# EAGLE board Circut_board_binary_decimal_converter (EAGLE 9.5.2)
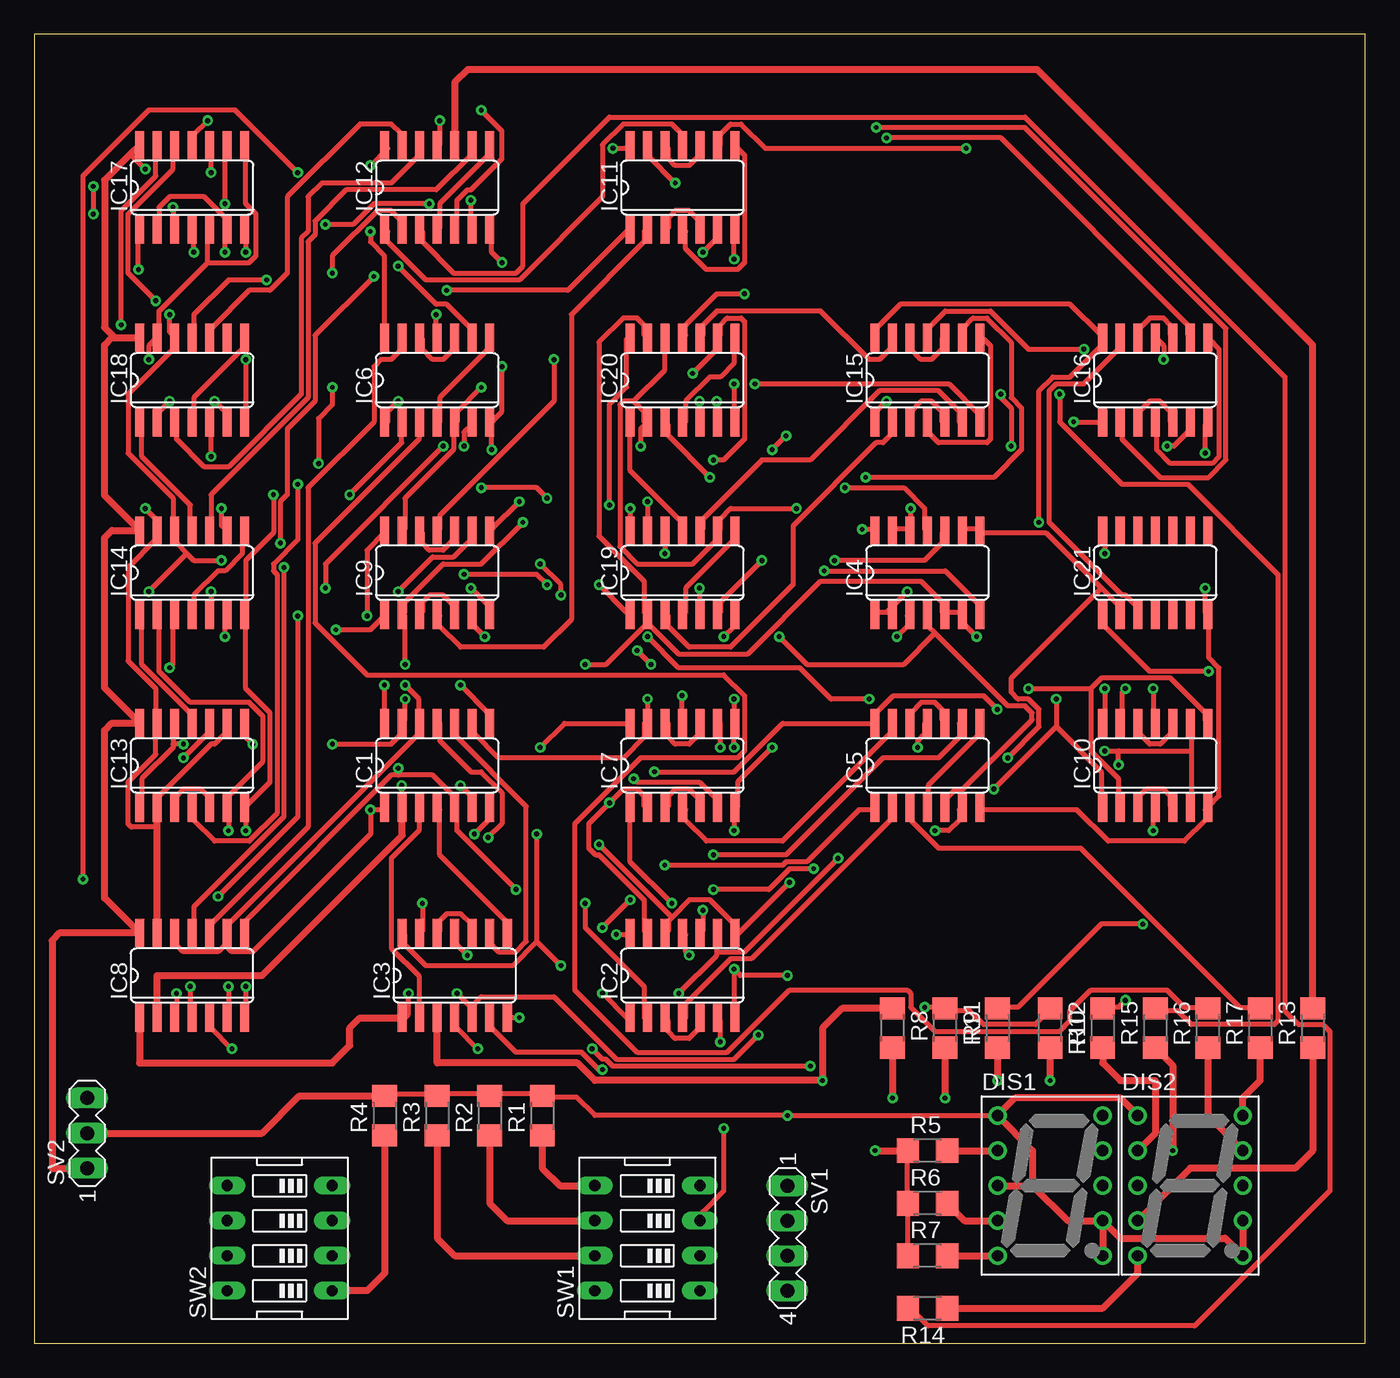
[diagram p0: board, top side]
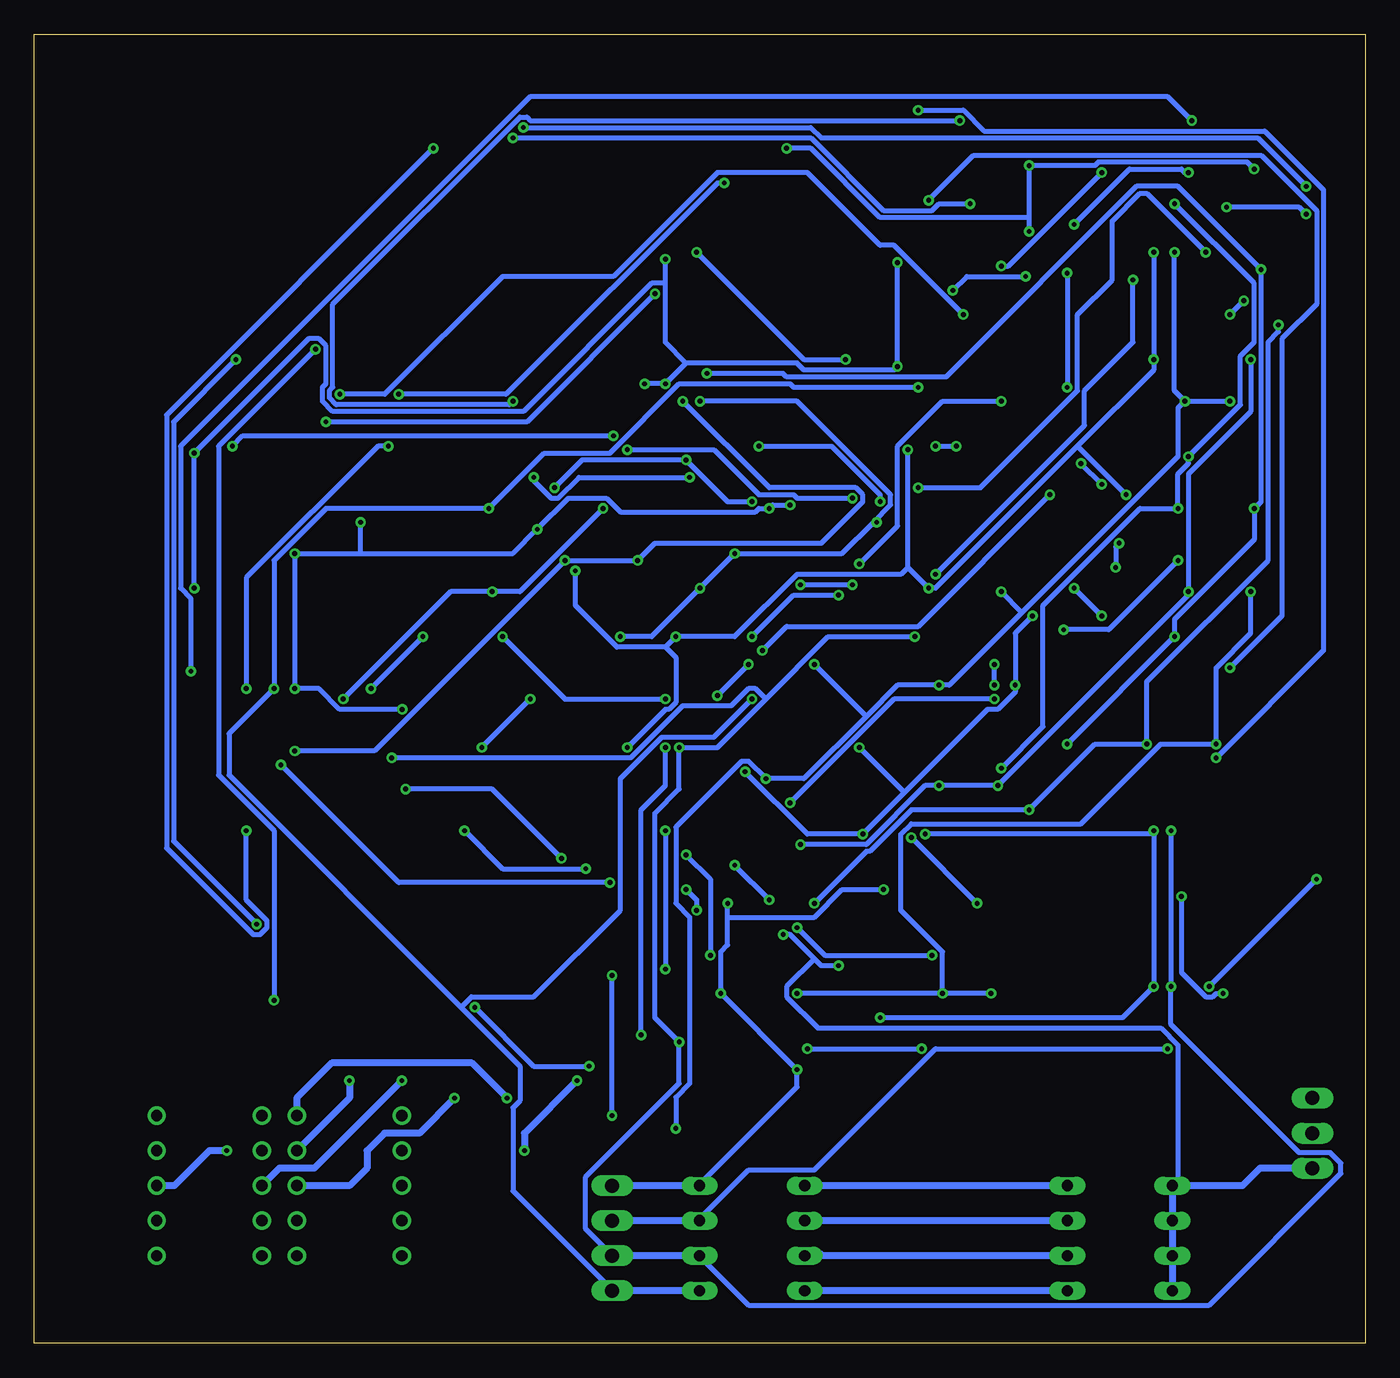
[diagram p1: board, bottom side, seen from below]

Size 96.5 x 94.92 mm. Coordinates in mm from the lower left corner, seen from the top.
Outline: 0,0 96.5,0 96.5,94.92 0,94.92 0,0
Copper layers (1*16): Top 0.035mm / dielectric 1.5mm / Bottom 0.035mm
Design rules "default *": minimum track width 0.35mm, minimum drill 0.35mm, track to track 6mil, track to pad 6mil, pad to pad 6mil, via to via 6mil, smd to smd 6mil, copper to edge 40mil, drill to drill 6mil, minimum pad ring 10mil, minimum via ring 8mil, stop-mask expansion 4mil, vias tented up to drill 0mil, thermal gap 10mil

## Footprints (pad centres in the part's own frame; a part is rotated, then mirrored left to right if it is on the bottom)
HDSP-E = drill 0.813: 1 -3.81,5.08; 2 -3.81,2.54; 3 -3.81,0; 4 -3.81,-2.54; 5 -3.81,-5.08; 6 3.81,-5.08; 7 3.81,-2.54; 8 3.81,0; 9 3.81,2.54; 10 3.81,5.08
SO14 = smd 0.66 x 2.032: 1 -3.81,-3.073; 2 -2.54,-3.073; 3 -1.27,-3.073; 4 0,-3.073; 5 1.27,-3.073; 6 2.54,-3.073; 7 3.81,-3.073; 8 3.81,3.073; 9 2.54,3.073; 10 1.27,3.073; 11 0,3.073; 12 -1.27,3.073; 13 -2.54,3.073; 14 -3.81,3.073
R1206 = smd 1.6 x 1.803: 1 -1.422,0; 2 1.422,0
MA04-1 = drill 1.016 long: 1 -3.81,0; 2 -1.27,0; 3 1.27,0; 4 3.81,0
MA03-1 = drill 1.016 long: 1 -2.54,0; 2 0,0; 3 2.54,0
EDG-04 = drill 0.813 long: 1 -3.81,-3.81; 2 -1.27,-3.81; 3 1.27,-3.81; 4 3.81,-3.81; 5 3.81,3.81; 6 1.27,3.81; 7 -1.27,3.81; 8 -3.81,3.81

## Placement (x,y rotation side)
DIS1  HD-F103  [HDSP-E]  73.66,11.43 0 top
DIS2  HD-F103  [HDSP-E]  83.82,11.43 0 top
IC1  4081D  [SO14]  29.21,41.91 0 top
IC2  4081D  [SO14]  46.99,26.67 0 top
IC3  4071D  [SO14]  30.48,26.67 0 top
IC4  4011D  [SO14]  64.77,55.88 0 top
IC5  4071D  [SO14]  64.77,41.91 0 top
IC6  4071D  [SO14]  29.21,69.85 0 top
IC7  4081D  [SO14]  46.99,41.91 0 top
IC8  4081D  [SO14]  11.43,26.67 0 top
IC9  4081D  [SO14]  29.21,55.88 0 top
IC10  4081D  [SO14]  81.28,41.91 0 top
IC11  4071D  [SO14]  46.99,83.82 0 top
IC12  4071D  [SO14]  29.21,83.82 0 top
IC13  4081D  [SO14]  11.43,41.91 0 top
IC14  4081D  [SO14]  11.43,55.88 0 top
IC15  4071D  [SO14]  64.77,69.85 0 top
IC16  4071D  [SO14]  81.28,69.85 0 top
IC17  4081D  [SO14]  11.43,83.82 0 top
IC18  4081D  [SO14]  11.43,69.85 0 top
IC19  4081D  [SO14]  46.99,55.88 0 top
IC20  4081D  [SO14]  46.99,69.85 0 top
IC21  4081D  [SO14]  81.28,55.88 0 top
R1  [R1206]  36.83,16.51 90 top
R2  [R1206]  33.02,16.51 90 top
R3  [R1206]  29.21,16.51 90 top
R4  [R1206]  25.4,16.51 90 top
R5  [R1206]  64.77,13.97 0 top
R6  [R1206]  64.77,10.16 0 top
R7  [R1206]  64.77,6.35 0 top
R8  [R1206]  62.23,22.86 270 top
R9  [R1206]  66.04,22.86 270 top
R10  [R1206]  73.66,22.86 270 top
R11  [R1206]  69.85,22.86 90 top
R12  [R1206]  77.47,22.86 90 top
R13  [R1206]  92.71,22.86 90 top
R14  [R1206]  64.77,2.54 180 top
R15  [R1206]  81.28,22.86 90 top
R16  [R1206]  85.09,22.86 90 top
R17  [R1206]  88.9,22.86 90 top
SV1  [MA04-1]  54.61,7.62 270 top
SV2  [MA03-1]  3.81,15.24 90 top
SW1  [EDG-04]  44.45,7.62 90 top
SW2  [EDG-04]  17.78,7.62 90 top

## Library data of the parts
DIS1 DIS2 = display-hp; OC_FARNELL: unknown; OC_NEWARK: unknown
IC1-IC21 = 40xx
R1-R17 = rcl; SPICEPREFIX: R
SV1 SV2 = con-lstb; OC_FARNELL: unknown; OC_NEWARK: unknown
SW1 SW2 = special

## Nets
N$1: IC1.3 IC3.2
N$2: IC1.2 IC1.6 IC2.8 IC2.12 IC4.10 IC8.2 IC10.6 IC10.9 IC14.5 IC17.5 IC17.8 IC18.13 IC19.6 IC20.6
N$3: IC6.4 IC6.8
N$4: IC1.8 IC4.5 IC4.6 IC7.6 IC8.5 IC9.9 IC10.2 IC10.8 IC17.2 IC17.6 IC18.2 IC18.6 IC19.2 IC20.13 SV1.2 SW1.3
N$5: IC1.1 IC1.12 IC2.2 IC4.4 IC5.5 IC8.9 IC8.12 IC9.2 IC13.8 IC17.13 IC19.5 IC19.12 IC20.5
N$6: IC2.6 IC4.8 IC4.9 IC7.9 IC8.6 IC9.6 IC13.6 IC14.2 IC21.2 SV1.3 SW1.2
N$7: R1.1 SW1.5 SW2.4
N$8: IC3.3 R5.1 R6.1 R7.1 R8.1
N$9: IC2.1 IC3.1 IC3.5 IC4.3 IC7.8 IC8.1 IC9.1 IC13.1 IC13.12 IC14.12 IC17.12 IC18.12
N$10: IC3.4 R9.1 R10.1
N$11: IC3.10 IC3.12
N$12: IC3.11 IC5.1
N$13: IC5.3 R17.2
N$14: IC1.4 IC3.8
N$15: IC1.10 IC3.9
N$16: IC1.11 IC3.13
N$17: IC2.3 IC2.5
N$18: IC2.4 IC5.2
N$19: IC1.13 IC2.13 IC4.11 IC7.2 IC8.13 IC13.2 IC13.9 IC13.13 IC14.6 IC14.13 IC17.1 IC19.13 IC20.9
N$20: IC5.4 IC5.8
N$21: IC5.10 IC5.12
N$22: IC5.11 IC6.1
N$23: IC6.3 R16.2
N$24: IC1.5 IC2.9 IC3.6 IC4.1 IC4.2 IC7.1 IC8.8 IC9.8 IC10.1 IC14.9 IC17.9 IC18.5 IC19.9 IC20.2 IC20.12 SV1.1 SW1.4
N$25: IC2.10 IC5.6
N$26: IC2.11 IC5.9
N$27: IC7.3 IC7.5
N$28: IC5.13 IC7.4
N$29: IC7.10 IC7.12
N$30: IC6.2 IC7.11
N$31: IC6.10 IC6.12
N$32: IC6.11 R15.2
N$33: IC6.6 IC8.3
N$34: IC6.9 IC8.4
N$35: IC6.13 IC8.10
N$36: IC11.3 IC11.5
N$37: IC11.4 IC11.8
N$38: IC11.10 IC11.12
N$39: IC11.11 IC12.1
N$40: IC12.3 R14.2
N$41: IC8.11 IC11.1
N$42: IC9.3 IC9.5
N$43: IC9.10 IC9.12
N$44: IC10.3 IC10.5
N$45: IC10.10 IC10.12
N$46: IC9.4 IC11.2
N$47: IC9.11 IC11.6
N$48: IC10.4 IC11.9
N$49: IC10.11 IC11.13
N$50: IC13.3 IC13.5
N$51: IC12.2 IC13.4
N$52: IC12.5 IC13.10
N$53: IC12.4 IC12.8
N$54: IC12.10 R13.2
N$55: IC13.11 IC14.1
N$56: IC14.4 IC14.8
N$57: IC12.6 IC14.3
N$58: IC12.9 IC14.10
N$59: IC12.11 IC15.1
N$60: IC15.3 IC15.5
N$61: IC15.4 IC15.8
N$62: IC15.10 IC15.12
N$63: IC15.11 R12.2
N$64: IC12.12 IC18.3
N$65: IC14.11 IC18.1
N$66: IC18.4 IC18.8
N$67: IC12.13 IC18.10
N$68: IC18.11 IC19.1
N$69: IC15.2 IC19.3
N$70: IC19.4 IC19.8
N$71: IC15.6 IC19.10
N$72: IC19.11 IC20.1
N$73: IC15.9 IC20.3
N$74: IC20.4 IC20.8
N$75: IC15.13 IC20.10
N$76: IC16.3 IC16.5
N$77: IC16.4 IC16.8
N$78: IC16.10 IC16.12
N$79: IC16.11 R11.2
N$80: IC16.1 IC20.11
N$81: IC17.11 IC21.1
N$82: IC16.2 IC17.3
N$83: IC16.6 IC17.4
N$84: IC16.9 IC17.10
N$85: IC16.13 IC21.3
N$86: IC1.9 IC4.12 IC4.13 IC6.5 IC7.13 IC9.13 IC10.13 SV1.4 SW1.1
N$87: R2.1 SW1.6 SW2.3
N$88: R3.1 SW1.7 SW2.2
N$89: R4.1 SW1.8 SW2.1
N$91: DIS1.8 R9.2
N$93: DIS1.2 R5.2
N$94: DIS1.4 R6.2
N$95: DIS1.10 R8.2
N$96: DIS1.5 R7.2
N$97: DIS1.9 R10.2
N$98: DIS2.3 R11.1
N$99: DIS2.2 R12.1
N$100: DIS2.4 R13.1
N$101: DIS2.5 R14.1
N$102: DIS2.8 R15.1
N$103: DIS2.9 R16.1
N$104: DIS2.10 R17.1
VDD: IC1.14 IC2.14 IC3.14 IC4.14 IC5.14 IC6.14 IC7.14 IC8.14 IC9.14 IC10.14 IC11.14 IC12.14 IC13.14 IC14.14 IC15.14 IC16.14 IC17.14 IC18.14 IC19.14 IC20.14 IC21.14 SV2.1 SW2.5 SW2.6 SW2.7 SW2.8
VSS: DIS1.1 DIS1.3 DIS1.6 DIS1.7 DIS2.1 DIS2.6 DIS2.7 IC1.7 IC2.7 IC3.7 IC4.7 IC5.7 IC6.7 IC7.7 IC8.7 IC9.7 IC10.7 IC11.7 IC12.7 IC13.7 IC14.7 IC15.7 IC16.7 IC17.7 IC18.7 IC19.7 IC20.7 IC21.7 R1.2 R2.2 R3.2 R4.2 SV2.2

## Tracks (layer width: path | path; a pad name or v marks a point on that pad's centre or on a via)
N$1
  Top 0.35: IC3.2 27.88,23.61 27.88,26.63 25.87,28.64 25.87,35.17 27.88,37.18 27.88,38.69 IC1.3
N$2  (via drill 0.35)
  Top 0.35: 83.9,42.95 83.9,44.97 IC10.9 | 83.9,42.95 83.9,38.94 IC10.6 | v52.75,56.77 49.74,53.76 49.74,53 IC19.6 | v58.03,56.77 64.56,56.77 65.81,58.03 65.81,58.78 IC4.10 | v49.49,68.33 49.49,66.82 IC20.6 | v77.62,42.95 78.63,42.95 | 78.63,42.95 83.9,42.95 | 46.22,30.9 47.48,32.15 48.98,32.15 50.74,30.39 50.74,29.89 IC2.8 50.99,29.64 v54.76,33.41 | 46.22,30.9 45.97,30.65 45.97,29.89 IC2.12 | 26.67,38.1 26.63,38.18 26.63,38.69 IC1.2 26.63,38.94 v26.63,40.44 | v12.81,54.51 12.81,53 IC14.5 | v8.29,71.34 8.29,72.35 8.79,72.85 IC18.13 9.04,73.1 9.04,74.86 12.56,78.37 | v30.9,40.44 31.65,39.69 31.65,38.94 IC1.6 | 12.56,78.37 12.56,80.64 IC17.5 | 12.56,78.37 15.57,78.37 16.08,78.88 16.08,81.89 15.32,82.64 15.32,86.66 IC17.8 | v40.95,36.17 46.22,30.9 | v78.63,41.95 78.63,42.95
  Top 0.508: IC8.2 8.89,26.67 16.51,26.67 26.67,36.83 26.67,38.1
  Bottom 0.35: v49.49,68.33 43.21,62.05 36.93,62.05 36.42,61.54 36.42,61.04 39.44,58.03 51.5,58.03 v52.75,56.77 v58.03,56.77 71.84,42.95 v77.62,42.95 | v8.29,71.34 8.29,67.57 12.81,63.05 v12.81,54.51 12.81,54.26 v26.63,40.44 v30.9,40.44 31.9,40.44 36.17,36.17 v40.95,36.17 | v78.63,41.95 70.08,33.41 v54.76,33.41
N$3
  Top 0.35: IC6.4 29.39,66.82 29.39,68.58 32.91,72.09 32.91,72.85 IC6.8
N$4  (via drill 0.35)
  Top 0.35: 76.62,47.48 76.62,42.95 78.63,40.95 78.63,38.94 IC10.2 | 76.62,47.48 77.37,48.23 82.39,48.23 84.91,45.72 84.91,45.22 IC10.8 | IC19.2 44.21,53 44.21,55.26 40.95,58.53 40.95,72.6 42.7,74.36 43.71,74.36 44.21,73.85 44.21,73.1 IC20.13 | 44.46,52.25 46.72,49.99 51.75,49.99 57.02,55.26 64.31,55.26 65.81,53.76 65.81,53 IC4.5 66.07,53 67.07,53 IC4.6 67.32,52.75 67.32,52.25 v68.33,51.24 | 44.46,52.25 44.46,52.75 IC19.2 | v72.09,47.48 76.62,47.48 | v14.32,21.35 12.81,22.86 12.81,23.36 IC8.5 | IC17.2 9.04,80.89 9.04,82.39 9.8,83.15 12.31,83.15 13.82,81.64 13.82,80.89 IC17.6 13.82,80.64 v13.82,79.13 | v9.8,68.33 9.04,67.57 9.04,66.82 IC18.2 | v13.06,68.33 13.82,67.57 13.82,66.82 IC18.6 | v30.9,47.73 32.91,45.72 32.91,45.22 IC1.8 | v43.46,40.95 43.71,40.69 48.23,40.69 49.49,39.44 49.49,38.94 IC7.6 | v26.38,54.51 28.89,57.02 30.39,57.02 31.65,58.28 31.65,58.78 IC9.9 | v49.99,15.57 49.99,11.05 48.48,9.55 48.48,9.04 SW1.3 | 44.46,52.25 41.45,49.23 v39.94,49.23 | 44.46,52.25 IC19.2
  Bottom 0.35: v68.33,51.24 v72.09,47.48 | v14.32,21.35 31.15,21.35 39.94,12.56 44.71,12.56 48.23,9.04 SW1.3 | SV1.2 54.51,9.04 53.51,9.04 53.34,8.89 | v13.06,68.33 v9.8,68.33 | 24.87,53 13.56,64.31 13.56,67.82 v13.06,68.33 | 24.87,53 30.14,47.73 v30.9,47.73 33.91,47.73 36.17,45.47 | 36.17,45.47 40.69,40.95 v43.46,40.95 44.71,42.2 45.22,42.2 49.99,37.43 49.99,31.9 48.98,30.9 48.98,18.84 49.99,17.84 v49.99,15.57 | 24.87,53 v26.38,54.51 | v13.82,79.13 13.82,69.08 v13.06,68.33 | 36.17,45.47 v39.94,49.23
  Bottom 0.508: SW1.3 53.34,8.89
N$5  (via drill 0.35)
  Top 0.35: 65.31,51.5 70.59,46.22 71.84,46.22 72.35,45.72 72.35,45.22 67.32,40.19 66.82,40.19 66.07,39.44 66.07,38.94 IC5.5 | 65.31,51.5 64.81,52 64.81,52.75 IC4.4 | v48.23,54.76 48.23,53 IC19.5 | v45.72,57.27 45.72,58.78 IC19.12 | v48.23,68.33 48.23,66.82 IC20.5 | 65.31,51.5 63.05,49.23 56.02,49.23 v54.01,51.24 | 13.82,28.89 13.31,28.39 10.8,28.39 10.3,28.89 10.3,29.64 IC8.12 | 13.82,28.89 13.82,29.64 IC8.9 | IC8.9 14.07,29.89 14.07,30.39 27.88,44.21 27.88,44.97 IC1.12 27.88,45.22 27.88,46.72 v26.88,47.73 | v26.88,49.23 26.88,52.75 IC9.2 26.88,53 26.88,53.76 29.64,56.52 32.41,56.52 v35.42,59.53 | v15.83,43.46 15.32,43.96 15.32,44.97 IC13.8 | IC1.1 25.37,38.69 v24.37,38.69 24.37,36.93 15.83,28.39 14.32,28.39 13.82,28.89 | v39.94,31.9 39.94,30.14 44.21,25.87 44.21,23.61 IC2.2 | v6.28,73.85 6.28,82.14 8.79,84.65 8.79,86.66 IC17.13 | 13.82,28.89 IC8.9
  Bottom 0.35: v48.23,68.33 41.2,68.33 34.41,61.54 34.41,60.79 35.67,59.53 | 35.67,59.53 37.93,57.27 v45.72,57.27 v48.23,54.76 51.75,51.24 v54.01,51.24 | v26.88,47.73 v26.88,49.23 | v39.94,31.9 36.17,35.67 35.92,35.67 32.91,38.69 v24.37,38.69 19.59,43.46 v15.83,43.46 15.83,47.98 7.03,56.77 7.03,72.6 6.28,73.35 v6.28,73.85 | v35.42,59.53 35.67,59.53
N$6  (via drill 0.35)
  Top 0.35: v14.07,25.87 14.07,23.61 IC8.6 | v14.07,37.18 14.07,38.69 IC13.6 14.07,38.94 14.07,39.69 16.58,42.2 16.58,45.47 15.57,46.47 11.3,46.47 9.04,48.73 9.04,52.75 IC14.2 | IC4.9 67.32,59.03 68.58,59.03 IC4.8 68.83,58.78 73.35,58.78 77.37,54.76 | 77.37,54.76 78.63,53.51 78.63,53 IC21.2 | v49.74,21.85 49.74,23.36 IC2.6 | v49.74,43.21 49.74,44.97 IC7.9 | v32.66,51.24 31.9,52 31.9,52.75 IC9.6 | 77.37,54.76 70.84,48.23 70.84,47.23 71.34,46.72 72.09,46.72 72.85,45.97 72.85,44.71 v70.59,42.45
  Bottom 0.35: v14.07,37.18 v14.07,25.87 14.07,23.11 4.77,13.82 2.51,13.82 1.76,13.06 1.76,12.31 11.3,2.76 44.71,2.76 48.23,6.28 SW1.2 | SV1.3 54.76,6.53 56.52,8.29 56.52,12.06 49.74,18.84 v49.74,21.85 51.5,23.61 51.5,38.43 49.74,40.19 v49.74,43.21 46.97,43.21 43.46,46.72 | v32.66,51.24 38.94,51.24 43.46,46.72 | v70.59,42.45 53.25,42.45 49.49,46.22 45.97,46.22 44.71,47.48 44.21,47.48 43.46,46.72
  Bottom 0.508: SW1.2 SV1.3
N$7
  Top 0.508: R1.1 36.83,12.7 38.1,11.43 SW1.5
  Bottom 0.508: SW2.4 SW1.5
N$8  (via drill 0.35)
  Top 0.35: IC3.3 29.14,23.36 29.14,23.11 29.21,22.86 | R7.1 63.3,6.53 63.3,10.05 R6.1 63.3,10.3 63.3,13.82 R5.1
  Top 0.508: R8.1 58.57,24.28 57.15,22.86 v57.15,19.05 40.64,19.05 39.37,20.32 29.21,20.32 29.21,22.86 | v60.96,13.97 R5.1
  Bottom 0.508: v57.15,19.05 60.96,15.24 v60.96,13.97
N$9  (via drill 0.35)
  Top 0.35: v21.85,51.75 24.37,51.75 25.37,52.75 IC9.1 | v13.56,56.77 11.55,56.77 11.05,57.27 | 11.05,57.27 10.3,58.03 10.3,58.78 IC14.12 10.05,59.03 10.05,61.29 6.78,64.56 6.78,68.83 10.05,72.09 10.05,72.85 IC18.12 10.05,73.1 9.8,73.35 v9.8,74.61 | v8.79,75.61 6.78,77.62 6.78,81.89 10.05,85.16 10.05,86.66 IC17.12 | v50.74,46.72 50.74,45.22 IC7.8 50.74,44.97 v50.74,43.21 | v62.55,51.24 63.3,52 63.3,52.75 IC4.3 | 10.05,43.46 10.05,44.97 IC13.12 | 10.05,43.46 10.05,43.21 7.79,40.95 7.79,38.94 IC13.1 | 31.65,24.37 31.65,23.61 IC3.5 31.65,24.37 | v30.65,25.37 31.65,24.37 | v27.13,25.37 27.13,23.86 26.88,23.61 IC3.1 | v41.2,25.37 42.95,23.61 IC2.1 | v10.8,43.46 10.05,43.46 | v52.5,22.36 50.74,20.6 42.2,20.6 37.68,25.12 32.41,25.12 31.65,24.37 | v8.29,54.51 11.05,57.27
  Top 0.508: IC8.1 7.62,20.32 21.59,20.32 22.86,21.59 22.86,22.86 23.6,23.6 IC3.1
  Bottom 0.35: v21.85,51.75 18.59,51.75 v13.56,56.77 | v9.8,74.61 v8.79,75.61 | v50.74,46.72 58.03,46.72 v62.55,51.24 | v27.13,25.37 v30.65,25.37 | v30.65,25.37 v41.2,25.37 | v30.65,25.37 30.65,28.39 33.66,31.4 33.66,36.93 32.91,37.68 20.6,37.68 14.82,43.46 v10.8,43.46 10.8,48.98 8.29,51.5 v8.29,54.51 | v50.74,43.21 50.74,40.44 52.5,38.69 v52.5,22.36
N$10  (via drill 0.35)
  Top 0.35: R10.1 73.6,24.11 72.6,23.11 68.83,23.11 67.82,24.11 66.07,24.11 R9.1 65.81,24.37 v64.56,24.37 | v32.15,21.35 30.65,22.86 30.65,23.36 IC3.4 | v40.44,21.35 41.2,20.6 41.45,20.6 41.95,20.1 v56.27,20.1
  Bottom 0.35: v40.44,21.35 v32.15,21.35 | v56.27,20.1 60.29,20.1 v64.56,24.37
N$11
  Top 0.35: IC3.12 29.39,29.89 29.39,30.65 29.89,31.15 30.9,31.15 31.65,30.39 31.65,29.89 IC3.10
N$12  (via drill 0.35)
  Top 0.35: v31.4,28.13 30.65,28.89 30.65,29.64 IC3.11 | v43.21,32.15 v41.2,30.14 | v45.72,34.67 54.26,34.67 54.51,34.92 56.02,34.92 59.79,38.69 60.79,38.69 IC5.1
  Bottom 0.35: v31.4,28.13 39.19,28.13 v41.2,30.14 | v45.72,34.67 v43.21,32.15
N$13
  Top 0.35: R17.2 88.67,24.37 87.42,24.37 75.86,35.92 65.56,35.92 63.55,37.93 63.55,38.69 IC5.3
N$14
  Top 0.35: IC1.4 29.39,38.69 29.39,35.42 34.16,30.65 34.16,29.89 IC3.8
N$15
  Top 0.35: IC1.10 30.65,44.97 30.65,43.96 35.67,38.94 35.67,29.14 34.92,28.39 33.66,28.39 33.16,28.89 33.16,29.64 IC3.9
N$16  (via drill 0.35)
  Top 0.35: v28.13,31.9 28.13,29.89 IC3.13 | v32.91,36.67 33.91,37.68 33.91,39.94 32.41,41.45 31.65,41.45 29.39,43.71 29.39,44.97 IC1.11
  Bottom 0.35: v32.91,36.67 v28.13,31.9
N$17
  Top 0.35: IC2.3 45.97,23.36 45.97,22.61 46.47,22.11 47.48,22.11 48.23,22.86 48.23,23.36 IC2.5
N$18
  Top 0.35: IC2.4 47.23,23.61 47.23,24.62 50.49,27.88 52,27.88 62.05,37.93 62.05,38.69 IC5.2
N$19  (via drill 0.35)
  Top 0.35: v44.46,61.04 44.46,59.03 IC19.13 | v49.23,64.06 49.99,64.06 51.5,65.56 51.5,74.1 51.24,74.36 50.24,74.36 49.74,73.85 49.74,73.1 IC20.9 49.49,72.85 49.49,72.09 v47.73,70.34 | v58.78,62.05 63.05,62.05 64.56,60.54 64.56,59.03 IC4.11 | 8.89,38.1 9.04,38.18 9.04,38.69 IC13.2 9.04,38.94 9.04,39.69 12.81,43.46 13.06,43.46 13.82,44.21 13.82,44.97 IC13.9 | 8.89,37.43 7.03,37.43 6.78,37.68 6.78,40.69 8.79,42.7 8.79,44.97 IC13.13 8.79,45.22 8.79,47.48 6.78,49.49 6.78,56.27 8.79,58.28 8.79,58.78 IC14.13 8.79,59.03 8.79,59.79 v8.04,60.54 | IC2.13 44.21,29.89 44.21,32.15 40.95,35.42 40.69,35.42 40.19,35.92 40.19,37.68 v41.7,39.19 42.7,40.19 43.71,40.19 44.21,39.69 44.21,38.94 IC7.2 | v7.54,77.87 7.54,80.64 IC17.1 | v13.82,51.24 13.82,52.75 IC14.6 | v21.6,43.46 25.87,43.46 26.63,44.21 26.63,44.97 IC1.13 26.88,45.22 v26.88,46.72
  Top 0.508: IC8.13 8.89,37.43 8.89,38.1
  Bottom 0.35: v44.46,61.04 46.22,61.04 v49.23,64.06 56.77,64.06 v58.78,62.05 | v21.6,43.46 v13.82,51.24 13.82,52.5 8.04,58.28 v8.04,60.54 7.54,61.04 v7.54,77.87 13.56,83.9 16.58,83.9 30.39,70.08 41.95,70.08 42.2,70.34 v47.73,70.34 | v41.7,39.19 34.16,46.72 v26.88,46.72
N$20
  Top 0.35: IC5.4 64.81,38.94 64.81,40.44 68.58,44.21 68.58,44.97 IC5.8
N$21
  Top 0.35: IC5.12 63.55,45.22 63.55,45.72 64.31,46.47 65.31,46.47 65.81,45.97 65.81,45.22 IC5.10
N$22  (via drill 0.35)
  Top 0.35: v26.38,68.33 25.62,67.57 25.62,66.82 IC6.1 | v36.67,56.52 38.18,55.01 v38.18,54.26 | v44.46,51.24 46.72,48.98 55.52,48.98 57.78,46.72 v60.54,46.72 | v64.06,43.21 64.06,43.71 64.56,44.21 64.56,44.97 IC5.11
  Bottom 0.35: v26.38,68.33 30.65,68.33 33.91,65.06 33.91,59.28 v36.67,56.52 | v38.18,54.26 41.45,54.26 v44.46,51.24 | v64.06,43.21 v60.54,46.72
N$23
  Top 0.35: R16.2 84.91,24.37 83.4,24.37 82.14,25.62 76.62,25.62 75.11,24.11 75.11,23.36 74.36,22.61 65.31,22.61 63.55,24.37 63.55,25.37 63.3,25.62 54.76,25.62 50.24,21.1 43.71,21.1 39.19,25.62 39.19,37.68 43.96,42.45 50.99,42.45 51.5,42.95 51.5,46.97 49.99,48.48 24.11,48.48 20.35,52.25 20.35,58.03 27.88,65.56 27.88,66.57 IC6.3
N$24  (via drill 0.35)
  Top 0.35: 61.8,53 62.05,53 IC4.2 | 61.8,53 61.04,53 IC4.1 | 74.1,44.71 77.37,41.45 77.37,38.94 IC10.1 | v74.1,46.72 74.1,44.71 | 61.8,53 v63.3,54.51 | v35.17,61.04 33.16,59.03 IC9.8 | v43.96,65.06 43.96,66.32 44.21,66.57 IC20.2 44.21,66.82 44.21,67.57 43.46,68.33 | 43.46,68.33 42.7,68.33 42.45,68.08 42.45,57.78 43.71,56.52 47.73,56.52 49.49,58.28 49.49,58.78 IC19.9 49.74,59.03 49.74,59.79 50.49,60.54 v55.26,60.54 | 43.46,68.33 45.72,70.59 45.72,72.85 IC20.12 | v12.81,64.31 12.81,66.57 IC18.5 | v13.56,60.54 13.56,59.28 13.82,59.03 IC14.9 | v13.82,82.64 13.82,86.66 IC17.9 | 26.38,41.2 28.89,41.2 30.39,39.69 30.39,38.94 IC1.5 30.65,38.69 30.65,37.18 v34.92,32.91 | 26.38,41.2 25.87,41.2 15.32,30.65 15.32,29.89 IC8.8 | v41.2,19.84 40.95,19.84 39.69,21.1 34.92,21.1 33.16,22.86 33.16,23.36 IC3.6 | 49.49,28.39 49.49,28.13 v46.72,25.37 | 49.49,28.39 49.49,29.64 IC2.9 | v46.22,31.9 43.21,34.92 43.21,38.69 IC7.1 | 26.38,41.2 v26.38,41.7 | v69.58,40.19 74.1,44.71 | v58.28,35.17 51.5,28.39 49.49,28.39
  Bottom 0.35: v74.1,46.72 66.32,54.51 v63.3,54.51 61.29,54.51 v55.26,60.54 | v35.17,61.04 35.17,61.54 38.69,65.06 v43.96,65.06 | v13.82,82.64 8.04,76.87 8.04,72.6 9.04,71.59 9.04,68.08 v12.81,64.31 12.81,63.8 13.56,63.05 v13.56,60.54 16.33,60.54 23.36,53.51 23.36,44.71 v26.38,41.7 | SW1.4 48.23,11.55 41.2,18.59 v41.2,19.84 v46.72,25.37 46.72,28.39 46.22,28.89 46.22,30.9 | 46.22,30.9 v46.22,31.9 | v34.92,32.91 37.93,32.91 39.94,30.9 46.22,30.9 | v69.58,40.19 63.3,40.19 v58.28,35.17
  Bottom 0.508: SW1.4 SV1.1
N$25  (via drill 0.35)
  Top 0.35: v48.48,31.4 48.48,29.89 IC2.10 | v49.23,32.91 53.25,32.91 54.76,34.41 v56.52,34.41 | v65.31,37.18 66.32,37.18 67.07,37.93 67.07,38.69 IC5.6
  Bottom 0.35: v48.48,31.4 48.48,32.15 v49.23,32.91 | v56.52,34.41 62.55,34.41 v65.31,37.18
N$26  (via drill 0.35)
  Top 0.35: v47.48,28.13 47.23,28.39 47.23,29.64 IC2.11 | v49.23,35.42 54.51,35.42 61.54,42.45 65.56,42.45 67.07,43.96 67.07,44.97 IC5.9
  Bottom 0.35: v47.48,28.13 47.48,33.66 v49.23,35.42
N$27
  Top 0.35: IC7.3 45.97,38.94 45.97,39.69 46.47,40.19 47.48,40.19 48.23,39.44 48.23,38.94 IC7.5
N$28
  Top 0.35: IC7.4 47.23,38.69 47.23,37.93 48.73,36.42 54.26,36.42 62.05,44.21 62.05,44.97 IC5.13
N$29
  Top 0.35: IC7.12 45.97,44.97 45.97,43.96 46.47,43.46 47.48,43.46 48.23,44.21 48.23,44.97 IC7.10
N$30  (via drill 0.35)
  Top 0.35: v22.86,61.54 26.63,65.31 26.63,66.57 IC6.2 | v44.71,49.23 v43.71,50.24 | v46.97,46.97 46.97,45.22 IC7.11
  Bottom 0.35: v22.86,61.54 32.41,52 41.95,52 v43.71,50.24 | v46.97,46.97 v44.71,49.23
N$31
  Top 0.35: IC6.12 28.13,72.85 28.13,72.09 28.89,71.34 29.64,71.34 30.39,72.09 30.39,72.85 IC6.10
N$32  (via drill 0.35)
  Top 0.35: v74.36,68.83 74.36,66.82 78.88,62.3 83.65,62.3 90.18,55.77 90.18,23.36 89.93,23.11 83.9,23.11 82.9,24.11 81.39,24.11 R15.2 | v29.14,74.61 29.14,73.1 IC6.11
  Bottom 0.35: v74.36,68.83 71.09,68.83 62.55,77.37 54.51,77.37 46.97,84.91 40.44,84.91 35.17,79.63 34.16,79.63 v29.14,74.61
N$33  (via drill 0.35)
  Top 0.35: v10.3,25.37 10.3,23.61 IC8.3 | v13.31,32.41 19.09,38.18 v19.09,52.75 | v21.1,54.76 21.1,56.52 v29.64,65.06 | v31.15,65.06 31.15,66.07 31.65,66.57 IC6.6
  Bottom 0.35: v10.3,25.37 10.8,25.37 11.05,25.12 11.55,25.12 13.31,26.88 v13.31,32.41 | v21.1,54.76 v19.09,52.75 | v31.15,65.06 v29.64,65.06
N$34  (via drill 0.35)
  Top 0.35: v11.3,25.87 11.3,23.61 IC8.4 | v3.52,33.66 3.52,84.65 8.29,89.43 14.57,89.43 v19.09,84.91 | v26.38,78.12 29.14,75.36 29.89,75.36 31.65,73.6 31.65,73.1 IC6.9
  Bottom 0.35: v3.52,33.66 v11.3,25.87 | v19.09,84.91 25.87,78.12 v26.38,78.12
N$35
  Top 0.35: IC8.10 12.81,29.89 12.81,30.39 19.84,37.43 19.84,62.05 24.62,66.82 24.62,70.84 25.12,71.34 25.87,71.34 26.63,72.09 26.63,72.85 IC6.13
N$36
  Top 0.35: IC11.3 45.97,80.89 45.97,81.64 46.47,82.14 47.48,82.14 48.23,81.39 48.23,80.89 IC11.5
N$37
  Top 0.35: IC11.4 47.23,80.64 47.23,79.38 48.73,77.87 50.99,77.87 51.5,78.37 51.5,86.16 50.99,86.66 IC11.8
N$38
  Top 0.35: IC11.12 45.97,86.66 45.97,85.91 46.47,85.41 47.48,85.41 48.23,86.16 48.23,86.66 IC11.10
N$39
  Top 0.35: IC12.1 25.62,80.64 25.62,79.88 28.39,77.12 35.17,77.12 41.2,83.15 41.2,86.92 42.7,88.42 46.22,88.42 46.97,87.67 46.97,86.92 IC11.11
N$40
  Top 0.35: R14.2 63.55,2.51 64.81,1.26 84.15,1.26 93.95,11.05 93.95,22.61 93.45,23.11 91.69,23.11 90.68,24.11 90.68,70.08 71.84,88.92 41.7,88.92 35.42,82.64 35.42,78.12 34.92,77.62 30.39,77.62 28.13,79.88 28.13,80.64 IC12.3
N$41  (via drill 0.35)
  Top 0.35: v18.09,56.27 18.09,38.18 11.55,31.65 11.55,29.89 IC8.11 | v17.84,58.03 17.84,61.04 18.34,61.54 18.34,66.32 20.35,68.33 20.35,73.1 v24.62,77.37 | v29.89,76.36 38.69,76.36 42.95,80.64 IC11.1
  Bottom 0.35: v18.09,56.27 18.09,57.78 v17.84,58.03 | v24.62,77.37 28.89,77.37 v29.89,76.36
N$42
  Top 0.35: IC9.3 28.13,53 28.13,53.76 28.64,54.26 29.64,54.26 30.39,53.51 30.39,53 IC9.5
N$43
  Top 0.35: IC9.12 28.13,58.78 28.13,58.03 28.64,57.52 29.64,57.52 30.39,58.28 30.39,58.78 IC9.10
N$44
  Top 0.35: IC10.3 80.13,38.94 80.13,39.69 80.64,40.19 81.89,40.19 82.39,39.69 82.39,38.94 IC10.5
N$45
  Top 0.35: IC10.12 80.13,44.97 80.13,44.21 80.89,43.46 81.64,43.46 82.39,44.21 82.39,44.97 IC10.10
N$46
  Top 0.35: IC9.4 29.39,52.75 29.39,52 30.9,50.49 36.93,50.49 38.94,52.5 38.94,74.61 44.21,79.88 44.21,80.64 IC11.2
N$47  (via drill 0.35)
  Top 0.35: v37.68,71.34 37.68,68.33 29.39,60.04 29.39,59.03 IC9.11 | v48.48,79.13 49.49,80.13 49.49,80.64 IC11.6
  Bottom 0.35: v37.68,71.34 40.69,71.34 v48.48,79.13
N$48  (via drill 0.35)
  Top 0.35: v81.14,37.18 81.14,38.69 IC10.4 | v67.57,86.66 53,86.66 51.24,88.42 50.49,88.42 49.74,87.67 49.74,86.92 IC11.9
  Bottom 0.35: v81.14,37.18 81.14,32.15 79.63,30.65 79.63,30.14 80.13,29.64 80.64,29.64 86.92,35.92 86.92,67.32 v67.57,86.66
N$49  (via drill 0.35)
  Top 0.35: v81.14,47.48 81.14,45.22 IC10.11 | v70.84,65.06 70.84,67.82 70.08,68.58 v70.08,68.83 | v46.47,84.15 44.46,86.16 44.46,86.66 IC11.13
  Bottom 0.35: v81.14,47.48 81.14,55.52 71.59,65.06 v70.84,65.06 | v70.08,68.83 62.3,68.83 46.97,84.15 v46.47,84.15
N$50
  Top 0.35: IC13.3 10.3,38.94 10.3,39.69 10.8,40.19 12.06,40.19 12.56,39.69 12.56,38.94 IC13.5
N$51  (via drill 0.35)
  Top 0.35: v19.09,62.3 19.09,58.28 17.33,56.52 17.33,56.02 17.58,55.77 17.58,38.43 15.57,36.42 13.06,36.42 11.55,37.93 11.55,38.69 IC13.4 | v20.6,63.8 20.6,67.07 21.6,68.08 v21.6,69.33 | v21.6,77.62 21.6,78.88 24.87,82.14 25.87,82.14 26.63,81.39 26.63,80.89 IC12.2
  Bottom 0.35: v20.6,63.8 v19.09,62.3 | v21.6,77.62 v21.6,69.33
N$52  (via drill 0.35)
  Top 0.35: v10.8,42.45 12.56,44.21 12.56,44.97 IC13.10 | v32.41,89.43 33.91,87.92 33.91,85.91 31.65,83.65 31.4,83.65 30.65,82.9 30.65,80.89 IC12.5
  Bottom 0.35: v10.8,42.45 3.01,50.24 3.01,83.65 7.29,87.92 27.63,87.92 29.14,89.43 v32.41,89.43
N$53
  Top 0.35: IC12.4 29.39,80.89 29.39,82.64 32.91,86.16 32.91,86.66 IC12.8
N$54
  Top 0.508: R13.2 92.71,72.39 72.72,92.38 31.42,92.38 30.48,91.44 IC12.10
N$55
  Top 0.35: IC14.1 7.79,52.75 7.79,49.23 11.3,45.72 11.3,45.22 IC13.11
N$56
  Top 0.35: IC14.4 11.55,53 11.55,54.26 13.31,56.02 13.82,56.02 15.07,57.27 15.07,58.78 IC14.8
N$57  (via drill 0.35)
  Top 0.35: v9.8,48.98 10.05,49.23 10.05,52.75 IC14.3 | v31.65,82.9 31.65,80.89 IC12.6
  Bottom 0.35: v9.8,48.98 6.03,52.75 6.03,72.85 3.52,75.36 3.52,82.14 7.54,86.16 28.39,86.16 v31.65,82.9
N$58
  Top 0.35: IC14.10 12.81,59.03 12.81,61.54 19.84,68.58 19.84,79.88 20.35,80.38 20.35,81.39 22.61,83.65 29.14,83.65 31.65,86.16 31.65,86.66 IC12.9
N$59  (via drill 0.35)
  Top 0.35: v29.39,88.67 29.39,86.92 IC12.11 | v61.8,68.33 61.04,67.57 61.04,66.82 IC15.1
  Bottom 0.35: v29.39,88.67 60.54,88.67 60.79,88.92 61.29,88.92 74.86,75.36 74.86,69.33 75.11,69.08 75.11,68.58 74.61,68.08 62.05,68.08 v61.8,68.33
N$60
  Top 0.35: IC15.3 63.55,66.82 63.55,67.57 64.31,68.33 65.06,68.33 65.81,67.57 65.81,66.82 IC15.5
N$61
  Top 0.35: IC15.4 64.81,66.57 64.81,66.07 65.56,65.31 69.08,65.31 69.33,65.56 69.33,72.35 68.83,72.85 IC15.8
N$62
  Top 0.35: IC15.12 63.55,72.85 63.55,72.09 64.31,71.34 65.06,71.34 65.81,72.09 65.81,72.85 IC15.10
N$63  (via drill 0.35)
  Top 0.35: v79.13,24.87 78.63,24.37 77.62,24.37 R12.2 | v76.11,72.09 72.09,72.09 69.33,74.86 66.07,74.86 64.81,73.6 64.81,73.1 IC15.11
  Bottom 0.35: v79.13,24.87 79.13,37.18 83.15,41.2 83.15,65.06 v76.11,72.09
N$64
  Top 0.35: IC18.3 10.3,66.57 10.3,65.56 12.31,63.55 14.07,63.55 19.34,68.83 19.34,80.13 19.84,80.64 19.84,83.15 20.85,84.15 25.87,84.15 27.88,86.16 27.88,86.66 IC12.12
N$65
  Top 0.35: IC18.1 7.79,66.57 7.79,64.31 11.3,60.79 11.3,59.03 IC14.11
N$66
  Top 0.35: IC18.4 11.55,66.82 11.55,68.58 15.07,72.09 15.07,72.85 IC18.8
N$67
  Top 0.35: IC18.10 12.81,73.1 12.81,73.6 15.57,76.36 17.08,76.36 18.34,77.62 18.34,83.15 23.61,88.42 25.87,88.42 26.63,87.67 26.63,86.92 IC12.13
N$68  (via drill 0.35)
  Top 0.35: v16.83,77.12 14.07,77.12 11.55,74.61 11.55,73.1 IC18.11 | v31.15,55.77 36.42,55.77 v37.18,55.01 | v40.95,55.01 42.95,53 IC19.1
  Bottom 0.35: v16.83,77.12 16.83,72.6 20.35,69.08 20.35,66.57 v31.15,55.77 | v40.95,55.01 v37.18,55.01
N$69
  Top 0.35: IC19.3 45.97,52.75 45.97,52 47.48,50.49 50.49,50.49 55.01,55.01 55.01,59.28 61.04,65.31 61.54,65.31 62.05,65.81 62.05,66.57 IC15.2
N$70
  Top 0.35: IC19.4 47.23,53 47.23,54.76 50.74,58.28 50.74,58.78 IC19.8
N$71
  Top 0.35: IC19.10 48.48,59.03 48.48,59.79 52.75,64.06 56.27,64.06 61.29,69.08 65.56,69.08 67.07,67.57 67.07,66.82 IC15.6
N$72
  Top 0.35: IC20.1 43.21,66.57 43.21,63.3 46.97,59.53 46.97,59.03 IC19.11
N$73  (via drill 0.35)
  Top 0.35: v48.98,62.8 45.97,65.81 45.97,66.57 IC20.3 | v60.29,62.8 69.58,62.8 71.59,64.81 71.59,67.82 70.84,68.58 70.84,72.6 69.08,74.36 68.08,74.36 67.32,73.6 67.32,73.1 IC15.9
  Bottom 0.35: v48.98,62.8 57.02,62.8 58.53,61.29 59.03,61.29 60.29,62.55 v60.29,62.8
N$74
  Top 0.35: IC20.4 47.23,66.82 47.23,68.33 48.98,70.08 49.74,70.08 50.74,71.09 50.74,72.85 IC20.8
N$75
  Top 0.35: IC20.10 48.48,73.1 48.48,73.85 49.49,74.86 57.02,74.86 60.54,71.34 61.29,71.34 62.05,72.09 62.05,72.85 IC15.13
N$76
  Top 0.35: IC16.3 80.13,66.82 80.13,67.57 80.89,68.33 81.64,68.33 82.39,67.57 82.39,66.82 IC16.5
N$77
  Top 0.35: IC16.4 81.39,66.57 81.39,64.81 82.39,63.8 85.41,63.8 85.91,64.31 85.91,72.09 85.16,72.85 IC16.8
N$78
  Top 0.35: IC16.12 80.13,73.1 80.13,73.6 80.89,74.36 81.89,74.36 82.39,73.85 82.39,73.1 IC16.10
N$79  (via drill 0.35)
  Top 0.35: v80.38,30.39 77.37,30.39 71.34,24.37 70.08,24.37 R11.2 | v81.89,71.34 81.89,72.35 81.39,72.85 IC16.11
  Bottom 0.35: v80.38,30.39 86.41,36.42 86.41,66.82 v81.89,71.34
N$80  (via drill 0.35)
  Top 0.35: v75.36,66.82 77.37,66.82 IC16.1 | v51.5,76.11 49.49,76.11 47.23,73.85 47.23,73.1 IC20.11
  Bottom 0.35: v75.36,66.82 60.79,66.82 v51.5,76.11
N$81  (via drill 0.35)
  Top 0.35: v85.16,48.73 80.89,48.73 77.62,52 77.62,52.75 IC21.1 | v12.56,88.67 11.55,87.67 11.55,86.92 IC17.11
  Bottom 0.35: v85.16,48.73 85.16,54.01 85.91,54.76 85.91,65.06 60.57,90.4 14.29,90.4 v12.56,88.67
N$82  (via drill 0.35)
  Top 0.35: v10.05,82.39 10.05,80.89 IC17.3 | v4.27,83.9 v4.27,81.89 | v61.04,88.17 71.84,88.17 86.41,73.6 86.41,64.06 85.16,62.8 81.64,62.8 78.88,65.56 78.88,66.57 IC16.2
  Bottom 0.35: v10.05,82.39 4.77,82.39 v4.27,81.89 | v4.27,83.9 7.79,87.42 39.44,87.42 40.19,88.17 v61.04,88.17
N$83  (via drill 0.35)
  Top 0.35: v11.55,79.13 11.55,80.64 IC17.4 | v32.41,62.05 36.42,62.05 v37.18,61.29 | v54.51,65.81 v53.51,64.81 | v82.14,65.06 82.64,65.06 83.65,66.07 83.65,66.57 IC16.6
  Bottom 0.35: v11.55,79.13 15.83,83.4 16.33,83.4 18.34,81.39 18.34,77.12 20.85,74.61 20.85,69.08 27.88,62.05 v32.41,62.05 | v37.18,61.29 41.2,61.29 41.45,61.54 43.96,61.54 47.23,64.81 v53.51,64.81 | v54.51,65.81 81.39,65.81 v82.14,65.06
N$84  (via drill 0.35)
  Top 0.35: v12.81,84.91 12.81,86.66 IC17.10 | v21.1,81.14 23.11,81.14 24.62,82.64 v28.64,82.64 | v61.8,87.42 70.08,87.42 83.65,73.85 83.65,73.1 IC16.9
  Bottom 0.35: v12.81,84.91 13.06,84.91 13.31,85.16 17.08,85.16 v21.1,81.14 | v28.64,82.64 30.9,82.64 31.4,82.14 34.92,82.14 40.19,87.42 v61.8,87.42
N$85
  Top 0.35: IC16.13 78.63,72.85 78.63,72.09 76.11,69.58 74.1,69.58 73.6,69.08 73.6,59.53 78.88,54.26 79.13,54.26 79.88,53.51 79.88,53 IC21.3
N$86  (via drill 0.35)
  Top 0.35: IC1.9 31.9,44.97 31.9,44.21 33.66,42.45 42.7,42.45 44.21,43.96 44.21,44.97 IC7.13 44.46,45.22 v44.46,46.72 | IC9.13 26.88,59.03 26.88,61.29 30.39,64.81 30.39,66.57 IC6.5 30.65,66.82 30.65,67.57 v32.41,69.33 | IC4.13 62.3,59.03 63.3,59.03 IC4.12 63.55,59.03 v63.55,60.54 | v79.13,47.48 78.88,47.23 78.88,45.22 IC10.13
  Bottom 0.35: 65.56,24.37 82.39,41.2 82.39,44.21 v79.13,47.48 79.13,56.77 75.36,60.54 v63.55,60.54 59.53,64.56 54.76,64.56 49.74,69.58 41.7,69.58 41.45,69.33 v32.41,69.33 | 65.56,24.37 61.29,20.1 61.29,17.58 61.8,17.08 61.8,11.05 54.76,4.02 SV1.4 | v44.46,46.72 47.23,43.96 50.99,43.96 54.01,40.95 54.01,31.4 60.29,25.12 64.81,25.12 65.56,24.37
  Bottom 0.508: SW1.1 SV1.4
N$87
  Top 0.508: R2.1 33.02,10.16 34.29,8.89 SW1.6
  Bottom 0.508: SW2.3 SW1.6
N$88
  Top 0.508: R3.1 29.21,7.62 30.48,6.35 SW1.7
  Bottom 0.35: 39.37,6.35 39.44,6.53 40.44,6.53 SW1.7
  Bottom 0.508: SW2.2 39.37,6.35
N$89
  Top 0.508: R4.1 25.4,5.08 24.13,3.81 SW2.1
  Bottom 0.508: SW2.1 SW1.8
N$91  (via drill 0.35)
  Top 0.508: R9.2 v66.04,17.78
  Bottom 0.508: v66.04,17.78 68.58,15.24 71.12,15.24 72.39,13.97 72.39,12.7 73.66,11.43 DIS1.8
N$93
  Top 0.508: R5.2 DIS1.2
N$94
  Top 0.508: R6.2 67.46,8.89 DIS1.4
N$95  (via drill 0.35)
  Top 0.508: R8.2 v62.23,17.78
  Bottom 0.508: v62.23,17.78 64.77,20.32 74.93,20.32 77.47,17.78 DIS1.10
N$96
  Top 0.508: R7.2 DIS1.5
N$97  (via drill 0.35)
  Top 0.508: R10.2 v73.66,19.05
  Bottom 0.508: v73.66,19.05 73.66,17.78 DIS1.9
N$98  (via drill 0.35)
  Top 0.508: R11.1 v69.85,19.05
  Bottom 0.508: v69.85,19.05 76.2,12.7 78.74,12.7 DIS2.3
N$99
  Top 0.508: R12.1 77.47,20.32 78.74,19.05 81.28,19.05 81.28,15.24 DIS2.2
N$100
  Top 0.508: R13.1 92.71,13.97 91.44,12.7 83.82,12.7 DIS2.4
N$101
  Top 0.508: R14.1 77.47,2.54 80.01,5.08 DIS2.5
N$102  (via drill 0.35)
  Top 0.508: R15.1 82.55,20.17 v82.55,13.97
  Bottom 0.508: v82.55,13.97 83.82,13.97 86.36,11.43 DIS2.8
N$103
  Top 0.508: R16.1 85.09,16.51 DIS2.9
N$104
  Top 0.508: DIS2.10 87.63,17.78 88.9,19.05 R17.1
VDD  (via drill 0.35)
  Top 0.35: IC15.14 61.04,73.1 61.04,73.6 62.8,75.36 75.11,75.36 77.37,73.1 IC16.14 77.37,72.85 77.37,72.35 75.11,70.08 73.85,70.08 72.85,69.08 v72.85,59.53 | v77.62,47.48 77.62,45.22 IC10.14 | v77.62,57.27 77.62,58.78 IC21.14 | v43.21,60.54 43.21,59.03 IC19.14 | v41.7,60.79 41.7,68.08 42.95,69.33 42.95,72.85 IC20.14 | v60.04,59.03 60.79,59.03 IC4.14 | v24.37,80.64 24.37,79.88 25.37,78.88 25.37,73.1 IC6.14 | v24.37,85.41 25.62,86.66 IC12.14 | v41.95,86.66 42.95,86.66 IC11.14 | 6.96,86.23 v8.04,85.16 | v25.37,47.73 25.37,45.22 IC1.14 | v24.11,52.75 24.11,57.52 25.37,58.78 IC9.14 | 36.42,29.14 34.67,27.38 28.39,27.38 26.88,28.89 26.88,29.64 IC3.14 | v36.42,36.93 36.42,29.14 | v42.2,29.64 42.95,29.64 IC2.14 | 36.42,29.14 v38.18,27.38 | v36.67,43.21 38.43,44.97 42.95,44.97 IC7.14 | v44.97,41.45 50.74,41.45 54.26,44.97 60.79,44.97 IC5.14 61.04,45.22 61.04,45.72 62.3,46.97 68.83,46.97 v69.83,45.97
  Top 0.508: SV2.1 1.27,12.7 1.27,29.21 1.8,29.74 IC8.14 5.08,32.28 5.08,44.45 5.61,44.98 IC13.14 5.08,47.52 5.08,58.42 5.61,58.95 IC14.14 5.08,61.49 5.08,72.39 5.61,72.92 5.82,72.92 | 5.82,72.92 IC18.14 | IC17.14 6.96,86.23 5.08,84.35 5.08,73.66 5.82,72.92
  Bottom 0.35: 72.85,57.27 v77.62,57.27 v77.62,47.48 75.86,47.48 74.36,45.97 v69.83,45.97 | 72.85,57.27 61.8,57.27 v60.04,59.03 57.78,61.29 55.01,61.29 54.01,60.29 44.21,60.29 43.96,60.54 v43.21,60.54 42.95,60.79 v41.7,60.79 | 72.85,57.27 v72.85,59.53 | 24.37,81.64 v24.37,85.41 19.59,85.41 19.34,85.66 8.54,85.66 v8.04,85.16 | 24.37,81.64 v24.37,80.64 | v41.95,86.66 40.19,86.66 35.17,81.64 24.37,81.64 | v24.11,52.75 25.37,51.5 v25.37,47.73 25.37,47.23 26.63,45.97 27.38,45.97 33.41,39.94 | 33.41,39.94 v36.42,36.93 40.44,36.93 v44.97,41.45 | v42.2,29.64 41.7,29.64 39.94,27.88 | 39.94,27.88 39.44,27.38 v38.18,27.38 | 33.41,39.94 v36.67,43.21 | 39.94,27.88 41.95,25.87 41.95,25.12 39.69,22.86 14.82,22.86 13.56,21.6 13.56,11.55 SW2.5
  Bottom 0.508: SV2.1 7.62,12.7 8.89,11.43 SW2.5 SW2.6 SW2.7 SW2.8
VSS  (via drill 0.35)
  Top 0.35: v15.32,25.87 15.32,23.61 IC8.7 | v15.32,37.18 15.32,38.69 IC13.7 15.32,38.94 17.08,40.69 17.08,45.72 15.32,47.48 15.32,52.75 IC14.7 15.32,53 15.32,56.77 17.33,58.78 v17.33,61.54 | v31.9,36.93 32.91,37.93 32.91,38.69 IC1.7 | v35.17,23.61 34.41,23.61 IC3.7 | IC5.7 68.83,38.69 75.61,38.69 77.87,36.42 83.4,36.42 84.91,37.93 84.91,38.69 IC10.7 85.16,38.94 85.91,39.69 85.91,48.98 85.16,49.74 85.16,52.75 IC21.7 84.91,53 v84.91,54.76 | v84.91,64.56 84.91,66.57 IC16.7 | v50.74,37.18 50.74,38.69 IC7.7 50.99,38.94 50.99,40.69 v53.51,43.21 | IC2.7 50.74,23.61 v50.74,27.13 51.2,26.67 v54.61,26.67 | v15.32,71.34 15.32,66.82 IC18.7 | v15.32,79.13 15.32,80.64 IC17.7 | v31.65,54.76 32.91,53.51 32.91,53 IC9.7 | v33.16,64.81 33.16,66.57 IC6.7 33.16,66.82 33.91,67.57 v33.91,70.84 | v33.91,78.37 33.16,79.13 33.16,80.64 IC12.7 | v49.99,51.24 50.74,52 50.74,52.75 IC19.7 | v50.74,69.58 50.74,66.82 IC20.7 | v50.74,78.63 50.74,80.64 IC11.7 | v57.27,56.02 66.07,56.02 68.58,53.51 68.58,53 IC4.7 | v52.25,69.58 66.32,69.58 68.58,67.32 68.58,66.82 IC15.7 | R4.2 25.62,18.09 29.14,18.09 R3.2 29.39,18.09 32.91,18.09 R2.2 33.16,18.09 36.67,18.09 R1.2 36.93,17.84 | 36.93,17.84 36.93,17.78 | DIS1.1 v54.61,16.51 40.64,16.51 39.31,17.84 36.93,17.84
  Top 0.508: SV2.2 16.51,15.24 19.2,17.93 R4.2 | DIS1.7 74.93,8.89 72.39,11.43 | DIS1.3 72.39,11.43 | 72.39,11.43 72.39,13.97 DIS1.1 71.12,17.78 78.74,17.78 DIS2.1 | DIS1.7 78.74,7.62 86.36,7.62 DIS2.6 DIS2.7 | DIS1.7 DIS1.6 | 36.93,17.78 36.83,17.78
  Bottom 0.35: 15.32,36.93 v15.32,25.87 17.58,23.61 v35.17,23.61 | 15.32,36.93 v31.9,36.93 | 15.32,36.93 v15.32,37.18 | v84.91,54.76 v84.91,64.56 76.62,72.85 75.86,72.85 75.36,72.35 75.36,69.58 75.61,69.33 75.61,68.33 74.86,67.57 61.04,67.57 51.75,76.87 50.74,76.87 | v50.74,37.18 v50.74,27.13 | v15.32,79.13 v15.32,71.34 15.32,70.59 20.85,65.06 | 20.85,65.06 31.15,54.76 v31.65,54.76 33.16,56.27 | 33.16,56.27 v33.16,64.81 | v33.91,78.37 v33.91,70.84 34.16,70.59 40.69,70.59 41.2,71.09 49.23,71.09 | 33.16,56.27 33.66,55.77 41.2,55.77 45.72,51.24 v49.99,51.24 50.74,50.49 | 49.23,71.09 v50.74,69.58 v52.25,69.58 | 50.74,76.87 50.74,72.6 49.23,71.09 | 50.74,76.87 v50.74,78.63 | v57.27,56.02 57.27,53.51 54.26,50.49 50.74,50.49 | v53.51,43.21 50.74,45.97 50.49,45.97 49.99,46.47 49.99,49.74 50.74,50.49 | 20.85,65.06 v17.33,61.54 | v54.61,16.51 v54.61,26.67